# Altium PCB PCB2.PcbDoc (part 2 of 2)
Units mil, origin at the board's own origin, x right, y up, seen from the top; angles counter-clockwise.
Board outline 6000 x 4000 mil, 2 copper layers (Top Layer, Bottom Layer); 194 components, 0 nets, 778 pads, 711 vias.
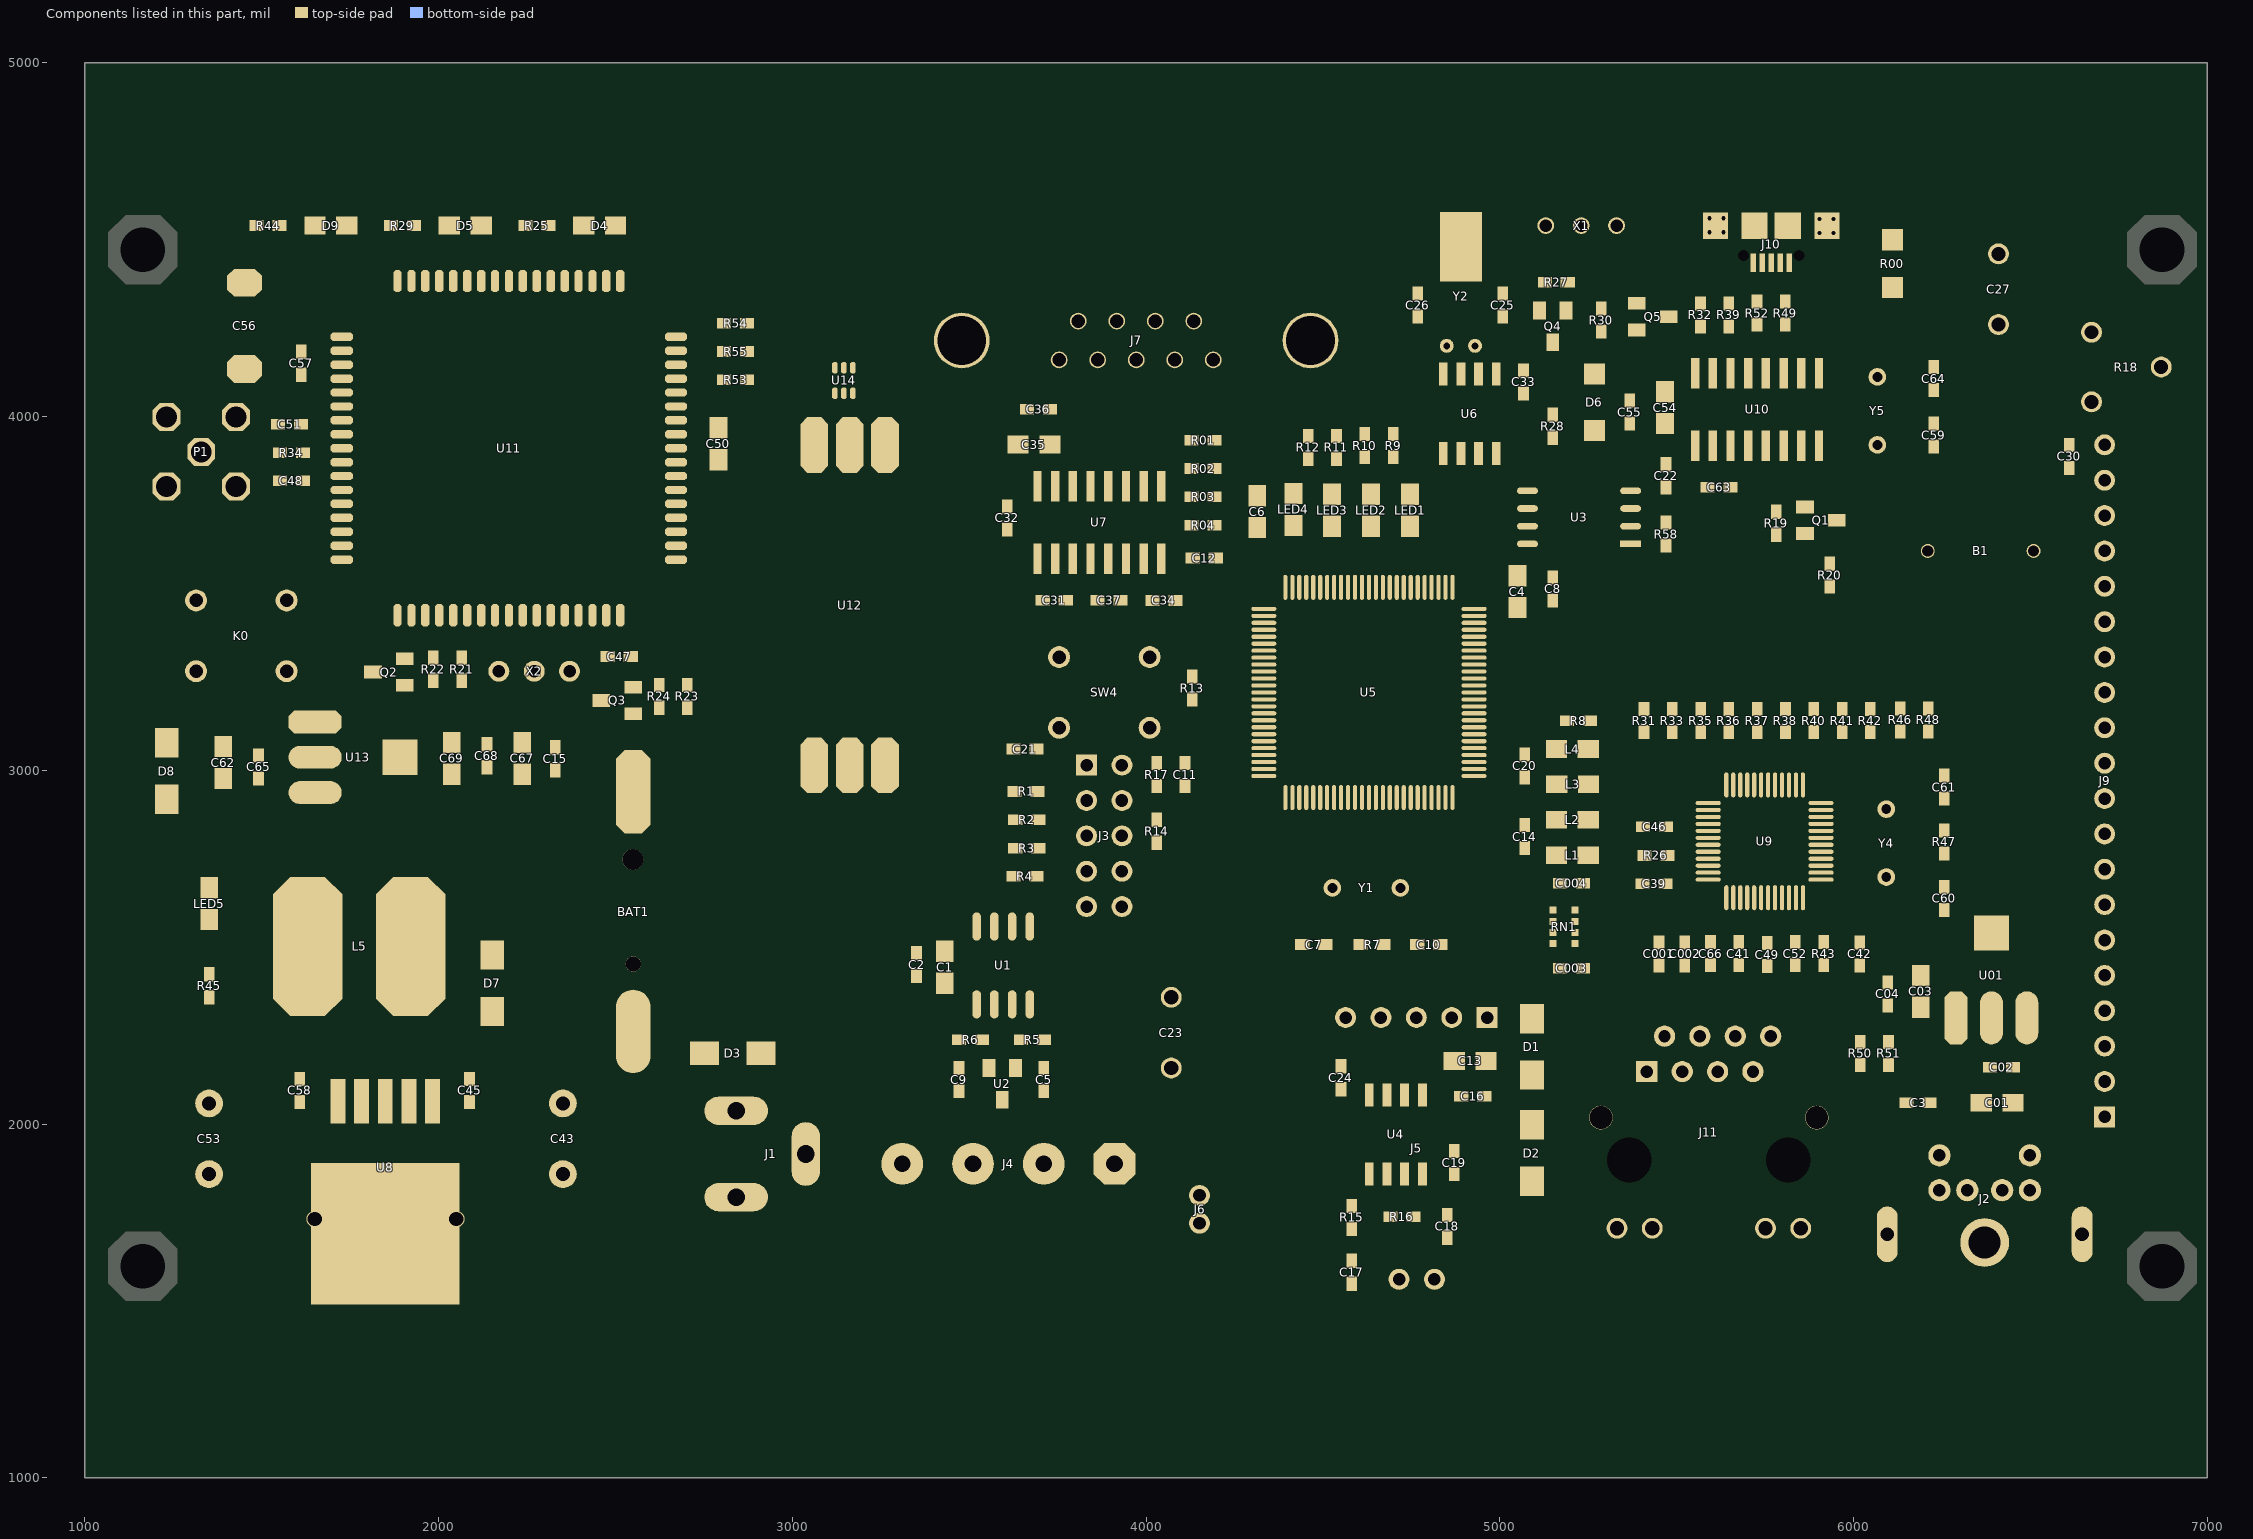
[diagram p2: the components of this part, seen from the top]

## Via types
v1: diameter 19.68, hole 11.81, Top Layer to Bottom Layer, tented both sides, 697 vias
v2: diameter 15.75, hole 11.81, Top Layer to Bottom Layer, tented both sides, 8 vias
v3: diameter 39.37, hole 27.56, Top Layer to Bottom Layer, tented both sides, 5 vias
v4: diameter 39.37, hole 19.68, Top Layer to Bottom Layer, tented both sides, 1 vias

## Nets (pads, with @x,y where several pads share a name; then routed paths per layer and width w, separated by ;. In a path a pad name is that pad's centre, name@x,y a point inside that pad or via, vN(x,y) a via of type N, cw(c..) or ccw(c..) an arc to the next point about the centre after c; other vN are vias at no path point) (continued)
copper on no net: | length 181062.3
  Top Layer w10: 2198.82,3438.2 v1(2198.82,3515.17) ; 2238.19,3438.2 2238.19,3510.08 2266.28,3538.17 2549.28,3538.17 2670.43,3417.02 4333.04,3417.02 ; v1(2281.28,3516.17) 2543.28,3516.17 2662.11,3397.33 4333.04,3397.33 ; 2370.28,3280.17 2370.28,3166.17 2430.28,3106.17 2752.28,3106.17 2868.28,3222.17 v1(3776.28,3222.17) ; 2703.39,3241.66 2713.9,3252.17 v1(3814.28,3252.17) ; 3145.67,4138.2 3145.67,4190.05 ; 3521.26,2558.2 3521.26,2640.44 3533.9,2653.08 3671.37,2653.08 3775.28,2549.17 4204.28,2549.17 4235.28,2580.17 4235.28,3052.17 4265.48,3082.37 4333.04,3082.37 ; 3671.26,2558.2 3704.3,2525.17 4222.28,2525.17 4255.28,2558.17 4255.28,3036.17 4281.8,3062.69 4333.04,3062.69 ; 3893.26,3803.34 3893.26,3725.63 3919.72,3699.17 4141.15,3699.17 ; 3932.01,2814.66 3951.5,2795.17 4030.28,2795.17 4188.28,2795.17 4213.28,2820.17 4213.28,3170.17 4243.6,3200.48 4333.04,3200.48 ; 3943.26,3803.34 3943.26,3738.62 3959.09,3722.79 4058.9,3722.79 4079.28,3743.17 4079.28,3837.17 4095.35,3853.24 4129.08,3853.24 ; 4010.28,3120.17 4010.28,3040.17 4030.28,3020.17 ; 4123.15,3699.17 4129.08,3693.24 4129.08,3684.41 ; v1(4130.28,3142.17) 4130.28,3200.17 ; v1(4190.28,2853.17) v1(4190.28,3286.17) ; 4194.08,3693.24 4241.35,3693.24 v1(4244.28,3696.17) ; 4194.08,3853.24 4196,3855.17 v1(4240.28,3855.17) ; 4195,3774.17 v1(4263.28,3774.17) ; 4197,3936.17 v1(4241.28,3936.17) ; v1(4257.06,3456.39) 4333.04,3456.39 ; v1(4278,3019.22) 4293.59,3003.63 4333.04,3003.63 ; v1(4279.74,3436.7) 4333.04,3436.7 ; v1(4287.91,3180.8) 4333.04,3180.8 ; v1(4319.28,3600.17) 4369.28,3600.17 4394.06,3575.39 4394.06,3517.41 ; 4333.04,2875.17 v4@4333.04,2909.17 ; 4333.04,2967.17 4333.04,2983.95 ; 4333.04,3102.06 v1(4395.17,3102.06) ; 4333.04,3121.74 4424.86,3121.74 4470.28,3167.17 4470.28,3335.17 v1(4446.28,3359.17) ; 4333.04,3141.43 4407.28,3141.43 4446.28,3180.43 v1(4446.28,3323.17) ; 4384.17,3633.4 4384.17,3613.84 4413.74,3584.26 4413.74,3517.41 ; 4394.06,2922.92 4394.06,3009.95 v1(4453.28,3069.17) ; v1(4394.28,3414.17) 4397.13,3417.02 4927.52,3417.02 ; 4413.74,2922.92 4413.74,2999.63 v1(4447.28,3033.17) ; 4416.9,3692.42 4416.9,3624.55 4427.28,3614.17 4609.28,3614.17 4630.28,3593.17 4630.28,3517.41 ; v1(4419.28,3391.17) 4425.45,3397.33 4927.52,3397.33 ; 4433.43,2922.92 4433.43,2987.32 v1(4482.28,3036.17) ; 4453.11,2922.92 4453.11,2975 v1(4477.28,2999.17) ; 4453.11,3517.41 4453.11,3466.33 4474.28,3445.17 v1(4513.28,3445.17) ; 4472.8,2922.92 4472.8,2962.69 v1(4512.28,3002.17) ; 4512.17,3517.41 v1@4512.17,3567.17 ; 4526.03,3690.17 4526.03,3648.17 4540.03,3634.17 4618.28,3634.17 4649.96,3602.48 4649.96,3517.41 ; 4531.85,3517.41 v1@4531.85,3593.17 ; 4571.22,2922.92 4571.22,3028.99 ; v1(4571.22,3465.17) 4571.22,3517.41 ; v1@4590.91,2866.8 4590.91,2922.92 ; v1(4590.91,3441.17) 4590.91,3517.41 ; 4606.89,2507.45 4506.89,2507.45 4526.89,2527.45 4526.89,2667.45 4610.59,2751.15 4610.59,2922.92 ; 4610.59,3517.41 4610.59,3462.85 4631.28,3442.17 v1(4864.28,3442.17) ; 4630.28,2922.92 4630.28,2756.19 4719.02,2667.45 4719.02,2555.33 4766.89,2507.45 4671.89,2507.45 ; 4636.27,3690.17 4636.27,3641.18 4669.65,3607.8 4669.65,3517.41 ; 4649.96,2922.92 v1(4649.96,2974.17) 4649.96,3266.85 v1(4751.28,3368.17) ; 4689.33,3517.41 4689.33,3633 4746.5,3690.17 ; 4709.02,3517.41 4709.02,3600.91 4737.28,3629.17 4773.28,3629.17 4840.28,3696.17 4840.28,3895.76 ; v1@4728.7,2871.17 4728.7,2922.92 ; 4728.7,3517.41 4728.7,3588.59 4751.28,3611.17 4783.28,3611.17 4890.28,3718.17 4890.28,3895.76 ; v1@4748.39,2845.17 4748.39,2922.92 ; 4748.39,3517.41 4748.39,3580.28 4762.28,3594.17 4794.28,3594.17 4940.28,3740.17 4940.28,3895.76 ; 4768.07,2913.33 4768.07,2821.37 4809.28,2780.17 5070.28,2780.17 ; 4768.55,4282.57 4768.55,4281.9 4850.28,4200.17 4890.28,4160.17 4890.28,4120.17 ; 4787.76,2922.92 4787.76,2834.69 4816.28,2806.17 5031.28,2806.17 5070.28,2845.17 ; 4807.44,2922.92 4807.44,2851 4829.28,2829.17 4970.28,2829.17 5070.28,2929.17 5070.28,2980.17 ; 4807.44,3517.41 4807.44,3578.33 5019.28,3790.17 5078.55,3790.17 ; 4827.13,2922.92 v1(4827.13,2974.17) ; 4827.13,3517.41 v1(4827.13,3567.02) ; v1(4839.28,2851.17) 4955.28,2851.17 5015.28,2911.17 5015.28,3035.17 5025.28,3045.17 5070.28,3045.17 ; 4846.82,2922.92 v1(4846.82,3007.41) ; 4846.82,3517.41 4846.82,3579.71 5007.28,3740.17 5078.55,3740.17 ; v1(4855.28,3035.17) 4867.13,3023.32 4927.52,3023.32 ; v1@4857.28,3062.69 4927.52,3062.69 ; v1@4857.28,3102.06 4927.52,3102.06 ; 4864.33,2301.03 4866.5,2303.2 ; 4866.5,2922.92 4866.5,2891.35 4880.36,2877.49 v1(4943.35,2877.49) ; 4866.5,3517.41 v1(4866.5,3565.95) ; v1(4879.28,3140.17) 4868.28,3151.17 4868.28,3185.17 4883.6,3200.48 4927.52,3200.48 ; v1(4879.45,3043) 4927.52,3043 ; v1@4879.48,3082.37 4927.52,3082.37 ; 4904.06,2983.95 4927.52,2983.95 4919.28,2975.7 v1(4919.28,2901.11) ; 4927.52,3003.63 4982.56,3003.63 4983.41,3004.47 ; 4927.52,3161.11 4989.23,3161.11 5024.28,3196.17 5279.28,3196.17 5321.28,3238.17 6366.28,3238.17 6426.28,3178.17 6426.28,2779.17 6586.28,2619.17 6586.28,2013.17 6546.28,1973.17 6484.28,1973.17 6446.28,1935.17 6446.28,1838.65 6420.48,1812.85 ; 4927.52,3180.8 4973.91,3180.8 5010.28,3217.17 5264.28,3217.17 5312.28,3265.17 6376.28,3265.17 6448.28,3193.17 6448.28,2792.17 6610.28,2630.17 6610.28,1991.17 6530.38,1911.27 6499.22,1911.27 ; 4927.52,3239.85 5253.97,3239.85 5304.28,3290.17 6393.28,3290.17 6494.28,3189.17 6494.28,2836.17 6710.28,2620.17 ; 4927.52,3259.54 5242.65,3259.54 5295.28,3312.17 6091.28,3312.17 ; 4927.52,3279.22 5228.34,3279.22 5281.28,3332.17 6200.28,3332.17 ; 4927.52,3298.91 5214.02,3298.91 5269.28,3354.17 6445.28,3354.17 6582.28,3217.17 6582.28,3048.17 6710.28,2920.17 ; 4927.52,3318.59 5198.28,3318.59 5255.85,3376.17 6461.28,3376.17 6610.28,3227.17 6610.28,3120.17 6710.28,3020.17 ; 4927.52,3338.28 5182.28,3338.28 5242.17,3398.17 6480.28,3398.17 6635.28,3243.17 6635.28,3195.17 6710.28,3120.17 ; 4927.52,3357.96 5164.28,3357.96 5223.48,3417.17 6507.28,3417.17 6704.28,3220.17 6710.28,3220.17 ; 4927.52,3377.65 5148.28,3377.65 5208.83,3438.2 6540.25,3438.2 6658.28,3320.17 6710.28,3320.17 ; 4927.52,3436.7 4990.75,3436.7 5002.41,3448.36 ; 4940.28,4120.17 4940.28,4190.17 4930.28,4200.17 4930.28,4204.3 5008.55,4282.57 ; v1(5130.07,3779.96) 5130.07,3919.96 5150.28,3940.17 ; v1(5140.28,3140.17) 5190.28,3140.17 ; v1(5161.28,3778.17) 5161.28,3881.17 5199.26,3919.15 5199.26,4157.02 v1(5230.75,4188.52) ; 5213.27,2509.93 v1(5264.77,2509.93) ; 5213.27,2541.43 v1(5247.92,2541.43) ; 5213.27,2572.92 5340.99,2572.92 ; 5213.27,2604.42 v1(5240.04,2604.42) ; 5235.28,2680.17 5250.28,2695.17 5250.28,2760.17 ; 5250.28,2959.38 5251.07,2960.17 ; v1(5260.28,3755.17) 5260.28,3667.17 5287.28,3640.17 5370.28,3640.17 5341.28,3640.17 ; v1(5290.28,3756.17) 5290.28,3709.17 5309.28,3690.17 5370.28,3690.17 5340.28,3690.17 ; 5331.42,1705.29 5331.42,1666.03 5379.28,1618.17 5913.28,1618.17 6019.26,1724.15 6019.26,2167.2 6019.26,2153.18 ; v2(5340.99,2248.2) 5340.99,2881.43 5367.03,2907.47 5589.55,2907.47 ; 5408,3108.2 5408,3027.2 5427,3008.2 5690,3008.2 5699.78,2998.41 5699.78,2958.65 ; 5416.07,2148.2 5360.67,2203.6 v1(5360.67,2601.9) 5360.67,2865.68 5382.78,2887.78 5589.55,2887.78 ; 5431.26,1705.29 5431.26,1719.74 5955.16,2243.63 5955.16,2668.83 5933.06,2690.93 5908.45,2690.93 ; 5450.28,2448.36 5450.28,2382.37 5514.22,2318.44 5514.22,2150.05 5516.07,2148.2 ; 5450.28,2513.36 v1(5450.28,2562.53) ; 5469,2679.2 5502,2679.2 5533.41,2710.62 5589.55,2710.62 5649.6,2710.62 5680.1,2680.11 5680.1,2639.75 5680.1,2578.99 5615.31,2514.2 5596,2514.2 ; 5470.91,2798.75 5494.53,2798.75 5543.3,2749.99 5589.55,2749.99 ; 5471.28,2848.41 5527.28,2848.41 ; 5474,2759.2 5506,2759.2 5534.89,2730.3 5589.55,2730.3 ; 5488,3083.2 5488,3108.2 5488,3052.2 5515,3025.2 5703,3025.2 5719.47,3008.73 5719.47,2958.65 ; v1(5522.88,2390.09) 5522.88,2448.36 ; 5522.88,2513.36 v1(5522.88,2561.74) ; 5568,3093.2 5568,3108.2 5568,3060.2 5583,3045.2 5712,3045.2 5739.15,3018.04 5739.15,2958.65 ; 5589.55,2809.04 v1(5641.72,2809.04) ; 5589.55,2828.73 v1(5659.89,2828.73) ; 5589.55,2848.41 5527.28,2848.41 ; 5589.55,2868.1 5662.3,2868.1 5671.7,2877.49 ; 5602.6,3917.81 v1(5602.6,3994.85) ; 5610.23,2958.65 5640.73,2958.65 5640.73,2904.52 5655.95,2889.3 ; 5612.64,2578.28 5652.01,2578.28 5660.41,2586.68 5660.41,2639.75 ; 5636.26,2769.67 5589.55,2769.67 5551.17,2769.67 5527.28,2793.56 5527.28,2848.41 ; 5647.6,4255.17 5702.6,4200.17 5702.6,4122.53 ; 5649.67,2710.69 5649.67,2768.08 ; 5652.6,3800.17 5673.11,3800.17 5702.6,3829.66 5702.6,3917.81 ; 5652.6,3917.81 v1(5652.6,3977.17) ; 5657.84,3098.36 5648,3108.2 5648,3081.2 5664,3065.2 5720,3065.2 5727,3058.2 5735,3050.2 5758.84,3026.36 5758.84,2958.65 ; 5676,2514.2 5676,2546.2 5719.47,2589.67 5719.47,2639.75 5719.47,2749.99 ; v1(5691.38,2716.07) 5699.78,2707.67 5699.78,2639.75 ; 5727.6,4260.17 5727.6,4242.85 v1(5762.25,4208.2) ; 5727.6,4325.17 5727.6,4350.72 5767.6,4390.72 5767.6,4434.85 ; 5728,3108.2 5728,3083.2 5778.52,3032.67 5778.52,2958.65 5778.52,3018.73 ; 5751.26,1705.29 5825.04,1779.07 5892.17,1779.07 5978.78,1865.68 5978.78,1932.81 5978.78,2696.39 5944.87,2730.3 5908.45,2730.3 ; 5752.6,3917.81 5752.6,3978.08 v1(5762.25,3987.73) ; 5756,2511.39 5756,2562.2 5778.52,2584.73 5778.52,2639.75 ; v1(5758.31,2708.2) 5758.84,2707.67 5758.84,2639.75 ; v1(5789.81,4208.2) 5807.6,4226 5807.6,4260.17 ; 5793.19,4434.85 5793.19,4339.58 5807.6,4325.17 ; v1(5793.74,3987.73) 5802.6,3978.87 5802.6,3917.81 ; 5798.21,2639.75 5798.21,2749.99 ; 5798.21,3008.41 5798.21,2958.65 5798.21,3098.41 5808,3108.2 ; 5817.89,2639.75 5817.89,2570.3 5836,2552.2 5836,2514.2 ; 5817.89,2958.65 5817.89,3039.1 5887,3108.2 5888,3108.2 ; 5821.3,2806.63 5858.26,2769.67 5908.45,2769.67 ; 5837.58,2639.75 5837.58,2592.62 5916,2514.2 ; 5837.58,2958.65 5837.58,3026.78 5870,3059.2 5948,3059.2 5968,3079.2 5968,3108.2 ; 5848.87,2749.99 5908.45,2749.99 5957.28,2749.99 ; v2(5851.89,2887.78) 5908.45,2887.78 ; 5852.6,3917.81 5852.6,3959.97 6004.93,4112.29 6067.6,4112.29 6095.48,4140.17 6227.6,4140.17 ; v2(5853.04,2848.41) 5908.45,2848.41 ; 5857.26,2987.47 5857.26,2958.65 5857.26,3010.47 5886,3039.2 v2(5926.28,3039.2) 6031,3039.2 6048,3056.2 6048,3108.2 ; v2(5862.28,2868.1) 5908.45,2868.1 ; v2(5863.72,2828.73) 5908.45,2828.73 5962.52,2828.73 5974,2840.2 5974,2980.2 5993,2999.2 6175,2999.2 6212,3036.2 6212,3109.73 6212,3117.2 ; 5902.6,3917.81 5902.6,3931.23 5978.78,4007.41 6041.78,4007.41 6067.6,3981.59 6067.6,3920.17 6072.6,3915.17 6227.6,3915.17 ; 5908.45,2789.36 6065.84,2789.36 6093,2762.2 ; 5908.45,2809.04 6067,2809.04 6093,2835.04 ; 5908.45,2907.47 v2(5908.45,2928.17) 5908.45,2997.65 5930,3019.2 6094,3019.2 6132,3057.2 6132,3109.73 6132,3117.2 ; v1@6008.47,2405.05 6018.15,2414.74 6018.15,2448.32 ; 6019.26,2232.2 6099.26,2232.2 ; v2(6062.28,2088.17) 6099.26,2125.15 6099.26,2167.2 ; 6093,2698.2 6093,2762.2 ; 6093,2890.33 6093,2835.04 ; 6197.3,3312.17 6091.28,3312.17 ; 6257,2670.2 6257,2765.2 6254,2762.2 6093,2762.2 ; 6257,2920.2 6257,2830.2 6252.15,2835.04 6093,2835.04 ; 6277.3,3332.17 6200.28,3332.17 ; 6710.28,2720.17 6525.28,2905.17 6525.28,3193.17 6406.28,3312.17 6091.28,3312.17 ; 6710.28,2820.17 6554.28,2976.17 6554.28,3204.17 6426.28,3332.17 6200.28,3332.17
  Top Layer w10.45: 6216.62,4086.15 6227.6,4075.17 6227.6,3980.17
  Top Layer w11.81: 2872.05,4104.03 2875.27,4100.81 3161.74,4100.81 3171.26,4110.33 3171.26,4138.2
  Top Layer w15.75: 2671.26,4068.12 2751.74,4068.12 2775.04,4044.81 3113.63,4044.81 3120.08,4051.27 3120.08,4066.2 3119.93,4066.2 ; 3060.08,3921.58 3062.21,3919.46 3062.21,4044.58 ; 3145.67,4066.2 v1(3145.67,4021.19) 3145.67,3935.99 ; 3147.09,3934.58 3145.67,3935.99 ; 3151.03,3930.64 3145.67,3935.99 ; 3162.21,3919.46 3162.21,3984.42 ; 3171.26,4066.2 3171.26,4042.29 3192.64,4020.92 3262.21,3951.35 3262.21,3919.46 ; 3181.66,4138.2 3171.26,4138.2 3291.89,4138.2 3338.04,4092.06 v1(3338.04,3927.17) ; 3262.21,3013.95 3311.11,3013.95 3338.02,3040.86 v1(3338.04,3093.17)
  Top Layer w19.68: 1314.38,3280.17 1570.28,3280.17 1811.78,3280.17 ; 1329.06,3900.4 1331.26,3898.2 ; 1351.26,2358.2 1351.26,2058.2 1355.71,2062.65 1607.48,2062.65 1607.48,1976.15 1629.37,1954.26 1763.23,1954.26 1782.29,1973.32 1782.29,2064.03 ; 1390.95,3066.94 1465.95,3066.94 1490.95,3041.94 ; 1485.28,4540.17 1485.28,4492.17 1514.28,4463.17 1640.28,4463.17 1726.38,4377.07 1726.38,4225.6 ; 1550.28,4540.17 1650.28,4540.17 ; 1607.48,2127.65 1680.4,2127.65 1715.36,2092.69 1715.36,2064.03 ; 1726.38,3674.42 1773.53,3674.42 1798.28,3699.17 1798.28,4473.17 1865.28,4540.17 ; 1814,3278.2 1814.28,3278.48 ; 1814,3368.34 1883.86,3438.2 ; 1814.28,3277.67 1814.28,3278.48 ; 1814.28,3368.07 1814.28,3278.48 ; 1817.86,3282.06 1814.28,3278.48 ; 1904.28,3240.17 2052.23,3240.17 2065.26,3253.2 ; 1930.28,4540.17 2030.28,4540.17 ; 2001.97,3438.2 2001.97,3545.48 1837.65,3709.8 1837.65,4451.54 1854.28,4468.17 2219.28,4468.17 2245.28,4494.17 2245.28,4540.17 ; 2065.26,3318.2 2077.31,3330.25 2128.39,3330.25 2158.31,3360.17 2238.28,3360.17 2270.28,3328.17 2270.28,3280.17 ; 2087.48,2127.65 2087.48,2254.42 2151.26,2318.2 ; 2310.28,4540.17 2410.28,4540.17 ; 2463.67,3194.9 2474.41,3205.65 2474.41,3438.2 ; 2543.39,3321.66 2544.65,3320.4 2544.65,3239.07 2547.25,3241.66 2623.39,3241.66 ; 2550.28,2938.82 2674.93,2814.17 3375.28,2814.17 3461.28,2900.17 v1@3461.28,3019.17 ; 2550.28,3160.17 2686.9,3160.17 2703.39,3176.66 ; 2671.26,3910.64 2724.18,3910.64 2756.62,3878.2 2791.26,3878.2 ; 2671.26,4028.75 2730.71,4028.75 2791.26,3968.2 ; 2671.26,4107.49 2803.59,4107.49 2807.05,4104.03 ; 2671.26,4146.86 2769.89,4146.86 2807.05,4184.03 ; 2671.26,4186.23 2729.26,4186.23 2807.05,4264.03 ; 2872.05,4184.03 v1(3007.33,4184.03) ; 2872.05,4264.03 v1(2931.26,4264.03) ; 3608.26,3680.98 3728.26,3680.98 3743.26,3665.98 3743.26,3598.62 ; 3628.28,2940.17 3630.28,2938.17 ; 3630.28,2780.17 3630.28,2860.17 3630.28,2938.17 ; 3690.28,2700.17 3775.79,2614.66 3832.01,2614.66 ; 3690.28,3060.17 3735.32,3060.17 3754.37,3079.22 3754.37,3120.17 ; 3693.26,3598.62 3693.26,3495.98 3708.26,3480.98 ; 3693.28,2940.17 3806.5,2940.17 3832.01,2914.66 ; 3695.28,2780.17 3766.5,2780.17 3832.01,2714.66 ; 3728.26,4020.98 3728.26,3920.98 3743.26,3905.98 3743.26,3803.34 ; 3773.26,3480.98 3793.26,3500.98 3793.26,3598.62 ; 3793.26,3803.34 3793.26,3946.2 3972.28,4125.22 3972.28,4160.17 ; 3832.01,3014.66 3812.96,2995.6 3644.14,2995.6 3630.28,2981.74 3630.28,2938.17 ; 3843.26,3598.62 3843.26,3500.98 3863.26,3480.98 ; 3843.26,3803.34 3843.26,3887.2 4081.28,4125.22 4081.28,4160.17 ; 3893.26,3598.62 3893.26,3544.98 3928.26,3509.98 3928.26,3480.98 ; 3943.26,3598.62 3943.26,3551.98 4008.26,3486.98 4008.26,3480.98 ; 4129.08,3693.24 4129.08,3773.24 ; 4129.08,3853.24 4129.08,3933.24 ; 4197.28,3600.17 v1(4319.28,3600.17) 4319.28,3681.17 4314.28,3686.17 ; 4416.9,3782.42 4458.54,3824.06 4458.54,3880.54 ; 4526.03,3780.17 4538.54,3792.68 4538.54,3880.54 ; 4564.33,2301.03 4637.17,2228.2 4731.26,2228.2 4781.26,2178.2 4781.26,2082.61 ; 4618.54,3885.54 4618.54,3797.89 4636.27,3780.17 ; 4698.54,3885.54 4698.54,3828.13 4746.5,3780.17 ; 4698.54,3950.54 4698.54,4037.43 4714.28,4053.17 4965.28,4053.17 4990.28,4078.17 ; 4956.26,2078.2 4956.26,2173.2 4961.26,2178.2 ; 4990.28,3895.76 v1(4990.28,4028.17) ; 4990.28,4120.17 4990.28,4078.17 ; 5008.55,4347.57 5044.88,4347.57 5067.45,4325 5067.45,4130.4 ; 5050.28,3460.17 5130.28,3460.17 5150.28,3480.17 ; 5067.45,4065.4 5003.04,4065.4 4990.28,4078.17 ; 5070.28,2780.17 5090.28,2760.17 5160.28,2760.17 ; 5070.28,2845.17 5085.28,2860.17 5160.28,2860.17 ; 5070.28,2980.17 5090.28,2960.17 5161.07,2960.17 ; 5070.28,3045.17 5085.28,3060.17 5160.28,3060.17 ; 5112.6,4300.17 5112.6,4365.17 5127.6,4380.17 ; 5147.6,4005.17 5147.6,4207.67 5150.1,4210.17 ; 5150.28,2541.43 5150.28,2509.93 5150.28,2460.17 5170.28,2440.17 ; 5150.28,2572.92 5150.28,2604.42 v1(5150.28,2637.33) 5150.28,2660.17 5170.28,2680.17 ; 5187.6,4300.17 5282.6,4300.17 5287.6,4305.17 ; 5192.6,4380.17 v1(5324.28,4380.17) ; 5267.6,3960.17 v1(5267.6,4040.33) ; 5267.6,4120.96 5335.16,4188.51 5455.16,4188.51 5477.6,4210.96 5477.6,4282.67 5477.6,4305.44 5492.33,4320.17 5567.6,4320.17 ; 5287.6,4240.17 v1(5337.05,4240.17) 5382.6,4240.17 5387.6,4245.17 ; 5367.6,3980.17 5467.6,3980.17 5467.6,3867.84 ; 5367.6,4045.17 5392.6,4070.17 5467.6,4070.17 5467.6,4106.49 5483.64,4122.53 v1(5516.28,4122.53) 5552.6,4122.53 5552.6,4240.17 5567.6,4255.17 ; 5370.28,3640.17 5465.28,3640.17 5470.28,3635.17 ; 5370.28,3740.17 5470.28,3740.17 ; 5370.28,3790.17 5370.28,3849.17 5386.28,3865.17 5470.28,3865.17 5550.6,3865.17 ; 5387.6,4320.17 5440.99,4373.55 5636.26,4373.55 5647.6,4362.22 5647.6,4320.17 ; 5470.28,3700.17 5470.28,3740.17 ; 5470.28,3800.17 5470.28,3740.17 ; 5543.28,3545.17 5543.28,3716.17 5519.28,3740.17 5470.28,3740.17 ; 5552.6,3917.81 5552.6,3835.17 5587.6,3800.17 ; 5566.07,2248.2 5566.07,2293.96 5597.28,2325.17 v1(5904.28,2325.17) ; 5636.26,2769.67 5666.78,2769.67 5686.46,2749.99 5719.47,2749.99 5798.21,2749.99 5848.87,2749.99 ; v1(5652.6,4054.07) 5652.6,4122.53 ; v1(5733.28,3666.17) 5782.28,3666.17 ; 5782.28,3731.17 5795.35,3744.24 5863.38,3744.24 ; 5933.28,3519.17 6174.28,3519.17 6210.28,3555.17 6210.28,3603.17 ; 5933.28,3584.17 5953.38,3604.27 5953.38,3706.74 ; 5957.28,2749.99 5967.28,2749.99 ; 6150.28,2060.17 6150.28,1985.17 ; 6243.31,1532.2 6243.31,1812.85 6185.16,1812.85 6150.28,1847.73 6150.28,1985.17 ; 6451.28,2060.17 6451.28,2018.17 6417.28,1984.17 6151.28,1984.17 6150.28,1985.17
  Top Layer w23.62: 1616.26,3898.2 1628.7,3910.64 1726.38,3910.64
  Top Layer w27.56: 1331.26,3898.2 1551.26,3898.2 1551.26,3818.2 ; 1611.26,3978.2 1616.26,3973.2 1616.26,3898.2 ; 3351.26,2418.2 3371.26,2398.2 3431.26,2398.2 ; 3351.26,2483.2 3426.26,2483.2 3431.26,2488.2 3446.3,2473.17 3956.3,2473.17 4071.26,2358.2 ; 3471.26,2238.2 3471.26,2158.2 3527.02,2158.2 ; 3510.87,1887.33 3527.02,1903.48 3527.02,2158.2 ; 3536.26,2238.2 3571.26,2273.2 3571.26,2338.2 ; 3556.26,2158.2 3527.02,2158.2 ; 3571.26,2473.17 3571.26,2558.2 ; 3621.26,2338.2 3621.26,2263.2 3646.26,2238.2 ; 3631.26,2158.2 3664.81,2158.2 ; 3710.87,1887.33 3660.87,1937.33 3660.87,2154.26 3664.81,2158.2 ; 3711.26,2238.2 3711.26,2158.2 3664.81,2158.2 ; 3932.01,3014.66 3991.5,2955.17 4030.28,2955.17 ; 4030.28,2860.17 v1(4030.28,2907.17) 4030.28,2955.17 ; 4110.28,2955.17 4030.28,2955.17 ; 4151.26,1719.46 4192.45,1760.64 4436.82,1760.64 4517.27,1841.09 4518.37,1841.09 4731.26,2053.98 4731.26,2082.61 ; 4151.26,1798.2 4421.26,1798.2 4631.26,2008.2 4631.26,2082.61 ; 4581.26,1548.2 4702.84,1548.2 4715.52,1560.88 ; 4581.26,1613.2 4581.26,1703.2 ; 4581.26,1768.2 4611.26,1768.2 4631.26,1788.2 4631.26,1858.2 ; 4681.26,1858.2 4681.26,1748.2 4691.26,1738.2 ; 4681.26,2082.61 4681.26,2118.2 ; 4731.26,1858.2 4731.26,1918.2 4751.26,1938.2 4856.26,1938.2 4871.26,1923.2 ; 4756.26,1738.2 4846.26,1738.2 4851.26,1743.2 ; 4781.26,1858.2 4861.26,1858.2 ; 4815.52,1560.88 4851.26,1596.62 4851.26,1678.2 ; 4871.26,2178.2 4871.26,2098.2 4891.26,2078.2 4891.26,1943.2 4886.26,1938.2 ; 4929.28,3467.17 4929.28,3503.17 4976.28,3550.17 5050.28,3550.17 ; 5078.55,3640.17 5078.55,3550.17 5145.28,3550.17 5150.28,3545.17 5543.28,3545.17 5826.28,3545.17 5863.38,3582.27 5863.38,3669.24 ; 5250.28,3060.17 5250.28,3135.17 5255.28,3140.17 ; 5404,2679.2 5404,2838.89 5405.28,2840.17 ; 5408,3173.2 5488,3173.2 v1(5528.28,3173.2) 5556.25,3173.2 ; 5596,2448.32 5756,2448.32 5916,2448.32 ; 5648,3173.2 5728,3173.2 5808,3173.2 5888,3173.2 5968,3173.2 ; 5967.28,2749.99 5991.46,2749.99 6018.15,2723.3 6018.15,2513.32 ; 6049.53,3174.73 v1(6090.28,3174.73) 6132,3174.73 6212,3174.73 6304.28,3174.73 6341.28,3137.73 6341.28,2589.14 6390.31,2540.11 ; 6096.89,2335.17 6131.96,2300.11 6290.31,2300.11 ; 6215.28,2060.17 6361.28,2060.17 6361.28,2135.17 6386.28,2160.17 ; 6217.25,2058.2 6218.94,2059.89
  Top Layer w39.37: 1351.26,2423.2 1351.26,2578.2 ; 1650.88,3036.91 1890.89,3036.91 1939.2,2988.59 2036.78,2988.59 2236.78,2988.59 ; 1715.36,2064.03 1715.36,2142.61 1747.48,2174.73 1810.48,2174.73 1849.22,2135.99 1849.22,2064.03 1849.22,1690.17 ; 1916.15,2064.03 1916.15,2175.36 ; 2151.26,2318.2 2207.81,2261.65 2550.28,2261.65 ; 3657.26,4014.98 3638.26,3995.98 3638.26,3920.98 v3(3638.26,3843.98) 3680.26,3801.98 ; 3754.37,3120.17 4010.28,3120.17 ; 3832.01,3014.66 3932.01,3014.66 ; 4071.26,2358.2 4266.26,2163.2 4551.26,2163.2 4656.26,2163.2 4681.26,2138.2 4681.26,2118.2 ; v3(4320.28,2567.17) v4(4320.28,2909.17) 4320.28,2967.17 ; v1(4365.28,3982.17) 4421.91,3982.17 4458.54,3945.54 4538.54,3945.54 4739.91,3945.54 v1(4773.28,3912.17) ; 4961.26,2178.2 4961.26,2297.96 4964.33,2301.03 ; 5091.26,1838.2 v3(5091.26,1738.2) 5091.26,1605.18 5166.28,1530.17 6480.28,1530.17 6523.28,1573.17 6523.28,1725.17 6665.28,1867.17 6833.28,1867.17 6924.28,1958.17 6924.28,3946.17 6728.28,4142.17 6528.28,4142.17 6410.28,4260.17 ; 5150.28,3545.17 5197.28,3592.17 v1@5197.28,3869.17 ; 5250.28,2860.17 5250.28,2959.38 ; 5566.07,2248.2 5616.07,2198.2 5616.07,2148.2 ; 5831.28,4413.17 v1(5879.28,4365.17) 6110.28,4365.17 ; 6019.26,2232.2 6019.26,2326.17 6019.26,2349.15 6083.59,2413.48 ; 6027.28,2513.32 6060.74,2513.32 6090.28,2483.78 6090.28,2420.17 6190.28,2420.17 6277.28,2507.17 6357.37,2507.17 6390.31,2540.11 6390.31,2300.11 ; 6110.28,4500.17 6190.28,4500.17 6410.28,4280.17 6410.28,4260.17 ; 6451.28,2060.17 6451.28,2160.17 v3(6490.28,2199.17) 6490.28,2300.07 ; 6710.28,2120.17 6772.28,2120.17 6821.28,2169.17 6821.28,3772.17 6773.28,3820.17 6710.28,3820.17 6545.28,3820.17 6410.28,3955.17 6410.28,4260.17
  Top Layer w59.06: 1231.26,3077.65 1097.88,3211.03 1097.88,4072.37 1159.77,4134.26 1451.26,4134.26 ; 1650.88,2936.91 1650.88,2857.56 1689.28,2819.17 2208.28,2819.17 2434.28,2593.17 3289.28,2593.17 3381.28,2501.17 ; 1995.52,2058.2 2326.22,2058.2 ; 2351.26,2058.2 2647.68,2058.2 2751.81,2162.33 2751.81,2200.17 ; 2841.26,2037.29 2911.26,2107.29 2911.26,2200.17 ; 4964.33,2301.03 5087.88,2301.03 ; 5091.26,1997.65 5091.26,2138.2
  Top Layer w78.74: 1351.26,2058.2 1293.15,2058.2 1208.11,2143.24 1208.11,2851.9 1293.12,2936.91 1615.18,2936.91 ; 1355.71,2062.65 1629.69,2336.62 1629.69,2501.98 ; 1451.26,4134.26 1517.41,4068.12 1718.32,4068.12 ; 1916.15,2175.36 1916.15,2497.1 1921.03,2501.98 1945.36,2477.65 2141.19,2477.65
  Bottom Layer w10: v1@2199.82,3516.17 v1(2281.28,3516.17) ; v1(3776.28,3222.17) 4506.91,3222.17 4590.91,3306.17 v1(4590.91,3441.17) ; v1(3814.28,3252.17) 4499.28,3252.17 4571.22,3324.11 v1(4571.22,3465.17) ; 3832.01,2614.66 3690.79,2614.66 3665.28,2640.17 3665.28,3320.17 3665.28,3402.17 3719.5,3456.39 v1(4257.06,3456.39) ; 3832.01,2714.66 3881.53,2764.17 4172.28,2764.17 4190.28,2782.17 v1(4190.28,2853.17) ; 3832.01,2814.66 3724.28,2814.66 3685.28,2853.66 3685.28,3290.17 3685.28,3392.7 3729.28,3436.7 v1(4279.74,3436.7) ; 3832.01,2914.66 3881.28,2963.92 3881.28,3140.17 3921.91,3180.8 v1(4287.91,3180.8) ; 4010.28,2974.17 v1(4649.96,2974.17) ; 4130.28,3130.17 4130.28,3120.17 4148.39,3102.06 v1(4395.17,3102.06) 4452.17,3102.06 v1(5130.07,3779.96) ; v1(4190.28,3286.17) 4472.28,3286.17 4513.28,3327.17 v1(4513.28,3445.17) ; v1(4240.28,3855.17) 4240.28,3752.17 4254.28,3738.17 4389.28,3738.17 4419.28,3708.17 v1(4419.28,3391.17) ; v1(4241.28,3936.17) 4436.28,3936.17 4471.28,3901.17 4471.28,3348.17 v1(4446.28,3323.17) ; v1(4244.28,3696.17) 4372.28,3696.17 4394.28,3674.17 v1(4394.28,3414.17) ; v1(4263.28,3774.17) 4429.28,3774.17 4446.28,3757.17 v1(4446.28,3359.17) ; v1(4447.28,3033.17) 4715.28,3301.17 6545.28,3301.17 6664.28,3420.17 6710.28,3420.17 ; v1(4453.28,3069.17) 4710.28,3326.17 6523.28,3326.17 6710.28,3513.17 6710.28,3520.17 ; v1(4477.28,2999.17) 4736.28,3258.17 6531.28,3258.17 6582.28,3207.17 6582.28,2480.17 6642.28,2420.17 6710.28,2420.17 ; v1(4482.28,3036.17) 4725.28,3279.17 6544.28,3279.17 6606.28,3217.17 6606.28,2561.17 6647.28,2520.17 6710.28,2520.17 ; v1(4512.28,3002.17) 4750.28,3240.17 6516.28,3240.17 6562.28,3194.17 6562.28,2401.17 6643.28,2320.17 6710.28,2320.17 ; v1(4512.28,3567.17) 4512.28,3926.17 4580.96,3994.85 v1(5602.6,3994.85) ; v1(4532.28,3593.17) 4532.28,3913.17 4596.28,3977.17 5592.62,3977.17 5593.72,3976.07 5651.5,3976.07 v1(5652.6,3977.17) ; 4564.33,2301.03 4602.28,2338.98 4602.28,2649.17 4729.28,2776.17 v1(4729.28,2871.17) ; v1(4751.28,3368.17) v1(5161.28,3778.17) ; 4764.33,2301.03 4919.28,2455.98 v1(4919.28,2901.11) ; v1(4827.13,2974.17) 4837.13,2984.17 5735.28,2984.17 5769.28,2950.17 5769.28,2836.17 5812.28,2793.17 5902.28,2793.17 5926.28,2817.17 v2(5926.28,3039.2) ; v1(4827.13,3567.02) 4848.28,3588.17 4848.28,3824.17 4877.28,3853.17 5257.28,3853.17 5290.28,3820.17 v1(5290.28,3756.17) ; v1(4839.28,2851.17) 4833.28,2845.17 v1@4748.39,2845.17 ; v1(4846.82,3007.41) 5753.04,3007.41 5774.28,2986.17 5785.28,2975.17 5785.28,2844.17 5818.28,2811.17 5892.28,2811.17 5908.45,2827.34 v2(5908.45,2928.17) ; v1@4857.28,3062.69 5780.76,3062.69 5818.28,3025.17 5818.28,2866.17 5836.04,2848.41 v2(5853.04,2848.41) ; v1(4857.28,3102.17) 5799.28,3102.17 5851.89,3049.56 v2(5851.89,2887.78) ; v1(4864.28,3442.17) 5088.28,3666.17 v1(5733.28,3666.17) ; 4864.33,2301.03 4864.33,2355.22 4942.8,2433.69 v1@4942.8,2877.49 ; 4866.5,2303.2 4876.28,2312.98 ; v1(4866.5,3565.95) 4866.5,3811.39 4888.28,3833.17 5239.28,3833.17 5260.28,3812.17 v1(5260.28,3755.17) ; v1(4879.28,3082.17) 5789.28,3082.17 5834.28,3037.17 5834.28,2881.62 5844.93,2870.97 5859.41,2870.97 v2(5862.28,2868.1) ; v1(4879.28,3140.17) v1(5140.28,3140.17) ; v1(4879.45,3043) 5774.28,3043 5801.28,3016 5801.28,2855.73 5828.28,2828.73 v2(5863.72,2828.73) ; v1(5240.04,2604.42) 5358.15,2604.42 v1(5360.67,2601.9) ; v1(5247.92,2541.43) 5429.18,2541.43 v1(5450.28,2562.53) 5450.28,2617.6 v1(5641.72,2809.04) ; v1(5264.77,2509.93) 5497.05,2509.93 5522.88,2535.76 v1(5522.88,2561.74) 5522.88,2661.74 5659.89,2798.75 v1(5659.89,2828.73) v1@5660.5,2828.11 ; v2(5340.99,2248.2) 5466.07,2248.2 ; v1(5522.88,2390.09) 5664.77,2248.2 5666.07,2248.2 ; v1(5528.28,3173.2) 5528.28,3150.83 5547.26,3131.85 6067.79,3131.85 6090.28,3154.34 v1(6090.28,3174.73) v1@6090.28,3176.82 ; v1(5762.25,3987.73) v1(5762.25,4208.2) ; v1(5793.74,3987.73) v1@5793.74,4204.26 ; 5851.11,1705.29 5976.4,1705.29 6018.28,1747.17 6018.28,2044.17 v2(6062.28,2088.17) ; v1@4748.39,2845.17 4748.39,2845.28 v1(4748.28,2845.17) v1@4748.39,2845.17
  Bottom Layer w15.75: v1(2931.26,4264.03) 2931.26,4043.12 2953.19,4021.19 v1(3145.67,4021.19) ; v1@3001.86,4184.03 v1(3007.33,4184.03) 3144.69,4184.03 3192.92,4135.8 v1(3192.92,4021.19) ; v1(3338.04,3093.17) v1(3338.04,3927.17)
  Bottom Layer w19.68: v1@3461.28,3020.17 3461.28,3987.17 3502.28,4028.17 v1(4990.28,4028.17) ; 3932.01,2914.66 3985.77,2914.66 4010.28,2939.17 4010.28,2974.17 4010.28,3120.17 ; v1(4030.28,2907.17) v4@4318.28,2907.17 ; 4175.28,3981.17 4175.28,3621.17 4196.28,3600.17 v1(4319.28,3600.17) ; v4(4320.28,2909.17) 4345.28,2934.17 4575.28,2934.17 ; 4558.28,2934.17 4575.28,2934.17 ; v1(4584.78,2860.67) 4584.78,2924.67 4575.28,2934.17 ; v1(4855.28,3035.17) 4777.28,3035.17 4676.28,2934.17 ; 5150.28,2619.38 5150.28,2414.66 5195.32,2369.62 5444.65,2369.62 5566.07,2248.2 ; 5230.28,4540.17 5230.75,4539.7 5230.75,4479.7 v1(5230.75,4188.52) ; v1(5251.28,2910.17) 5227.28,2934.17 4676.28,2934.17 ; v1(5267.6,4040.33) 5267.6,4477.49 5330.28,4540.17 ; v1(5324.28,4380.17) 5864.28,4380.17 v1(5879.28,4365.17) ; v1(5337.05,4240.17) 5337.05,4094.4 5377.38,4054.07 v1(5652.6,4054.07) ; v1(5516.28,4122.53) 5516.28,4362.17 5533.28,4379.17 ; v1(5904.28,2325.17) v1(6018.26,2325.17) ; 6673.43,4041.74 6766.7,4041.74 6793.28,4015.17 6793.28,3748.17 6765.28,3720.17 6710.28,3720.17 ; 6710.28,2220.17 6780.28,2220.17 6826.28,2266.17 6826.28,4096.17 6870.28,4140.17 ; 4575.28,2934.17 4676.28,2934.17
  Bottom Layer w39.37: v3(2137.28,2942.17) 2137.28,2893.17 2498.28,2532.17 4285.28,2532.17 v3(4320.28,2567.17) ; 3568.28,2535.17 3568.28,3774 v3(3638.26,3843.98) 3776.45,3982.17 v1(4365.28,3982.17) ; 4071.26,2358.2 4691.26,1738.2 v3(5091.26,1738.2) ; v1(4773.28,3912.17) 5174.28,3912.17 5195.28,3891.17 v1@5195.28,3885.17 ; 6673.43,4238.59 6629.71,4238.59 6566.28,4175.17 6566.28,3888.17 6634.28,3820.17 6710.28,3820.17
  Bottom Layer w59.06: 2351.26,2058.2 2449.25,2058.2 2520.28,1987.17 2520.28,1671.17 2589.28,1602.17 3821.28,1602.17 3910.87,1691.76 3910.87,1887.33
  other v1: 4368.55,1546.78 4423.67,1558.59 1577.21,1568.44 2394.14,1578.28 5329.18,1582.22 5470.91,1582.22 5589.02,1582.22 5671.7,1582.22 5774.06,1582.22 5876.42,1582.22 2138.23,1588.12 4478.78,1590.09 1350.83,1597.96 2216.97,1607.81 1478.78,1617.65 6006.34,1617.65 4045.71,1633.4 6183.51,1637.33 4466.97,1645.21 2354.77,1647.18 5230.75,1653.08 4388.23,1657.02 2945.32,1686.55 4301.62,1688.52 2640.2,1696.39 2709.1,1696.39 2837.05,1696.39 4474.85,1700.33 1468.94,1706.23 4045.71,1723.95 3614.61,1725.92 6183.51,1725.92 3496.5,1735.76 3781.93,1735.76 3348.86,1745.6 3122.49,1765.29 2640.2,1775.13 1528,1784.97 2157.92,1784.97 5230.75,1786.94 4734.69,1790.88 1163.82,1794.81 4045.71,1798.75 1252.41,1804.66 3388.23,1804.66 5002.41,1826.31 6085.08,1834.18 2098.86,1863.71 4301.62,1865.68 1537.84,1873.55 2246.5,1873.55 2620.52,1873.55 6577.21,1873.55 5524.06,1883.4 2827.21,1893.24 6350.83,1893.24 4049.65,1901.11 5002.41,1901.11 4402.01,1903.08 1124.45,1912.92 2925.63,1922.77 4106.74,1922.77 6085.08,1922.77 5230.75,1928.67 1252.41,1932.61 2433.51,1932.61 2620.52,1932.61 3142.17,1932.61 6380.36,1932.61 6626.42,1932.61 6754.38,1932.61 1498.47,1942.45 2738.63,1942.45 6321.3,1942.45 6685.48,1942.45 6823.27,1942.45 4707.13,1948.36 2118.55,1952.3 4293.75,1962.14 4766.19,1968.04 4998.47,1968.04 4935.48,1971.98 5445.32,1981.82 5602.8,1981.82 4837.05,1983.79 1478.78,1991.67 1203.19,2001.51 6085.08,2001.51 3870.52,2011.35 6783.9,2011.35 6852.8,2011.35 4215.01,2031.04 4553.59,2031.04 5405.95,2040.88 5533.9,2040.88 5632.33,2040.88 3191.38,2050.72 6813.43,2050.72 1114.61,2060.56 6655.95,2060.56 3833.12,2070.41 3943.35,2070.41 5018.15,2070.41 6862.64,2090.09 3339.02,2099.93 4435.48,2101.9 5230.75,2105.84 3063.43,2109.78 6281.93,2109.78 6537.84,2109.78 4833.12,2117.65 3850.83,2149.15 2236.66,2158.99 2000.44,2168.83 2463.04,2168.83 6655.95,2168.83 3939.41,2172.77 1783.9,2174.73 2364.61,2178.67 1705.16,2188.52 1842.96,2188.52 2059.49,2188.52 3152.01,2188.52 3250.44,2188.52 6207.13,2196.39 1104.77,2198.36 1291.78,2198.36 1616.58,2198.36 3043.75,2198.36 6547.68,2198.36 2157.92,2218.04 3998.47,2223.95 1665.79,2227.89 1803.59,2227.89 5868.55,2227.89 4500.44,2237.73 4407.92,2239.7 6222.88,2243.63 4342.96,2247.57 6655.95,2267.26 1419.73,2277.1 1291.78,2286.94 2640.2,2286.94 4431.54,2286.94 2876.42,2296.78 3191.38,2306.63 3388.23,2306.63 2069.34,2316.47 3004.38,2326.31 3968.94,2326.31 4283.9,2326.31 6872.49,2334.18 1468.94,2336.15 3073.27,2336.15 2787.84,2346 3270.12,2346 3752.41,2346 4372.49,2346 4482.72,2349.93 4211.07,2357.81 5747.28,2373.17 5613.28,2374.17 5686.28,2374.17 5824.28,2374.17 1114.61,2375.52 2069.34,2375.52 2659.89,2385.37 3840.99,2385.37 2433.51,2395.21 4716.97,2395.21 2266.19,2405.05 6006.34,2405.05 1429.57,2414.89 4155.95,2414.89 4539.81,2414.89 3279.97,2424.74 2403.98,2434.58 4274.06,2434.58 4382.33,2434.58 4100.83,2436.55 2630.36,2444.42 2738.63,2444.42 4716.97,2454.26 6764.22,2464.11 2315.4,2483.79 1468.94,2493.63 2394.14,2493.63 1291.78,2503.48 6148.08,2515.29 1104.77,2523.16 6872.49,2523.16 1429.57,2542.85 2315.4,2542.85 6144.14,2552.69 2216.97,2562.53 2089.02,2572.37 6655.95,2572.37 4431.54,2582.22 4854.77,2582.22 5907.92,2582.22 6498.47,2582.22 4667.76,2601.9 5560.28,2611.17 1488.63,2611.74 4165.79,2611.74 6094.93,2611.74 3632.33,2613.71 4087.05,2621.59 6153.98,2621.59 2285.87,2631.43 4785.87,2631.43 5589.28,2636.17 3417.76,2641.27 5907.92,2641.27 6478.78,2641.27 1104.77,2651.11 2207.13,2651.11 3466.97,2651.11 1429.57,2660.96 4126.42,2660.96 3782.01,2664.89 2108.71,2670.8 6409.89,2670.8 6764.22,2670.8 2492.56,2680.64 2659.89,2690.48 4087.05,2700.33 4165.79,2700.33 4441.38,2700.33 6183.51,2700.33 1498.47,2710.17 2177.6,2710.17 2768.15,2710.17 3427.6,2710.17 3750.44,2712.14 1291.78,2729.85 2118.55,2729.85 4776.03,2729.85 4864.61,2729.85 6648.08,2731.82 2059.49,2739.7 6872.49,2743.63 1380.36,2749.54 2659.89,2749.54 2856.74,2749.54 3466.97,2759.38 2443.35,2769.22 1449.26,2779.07 1577.21,2788.91 6494.53,2790.88 5730.75,2798.75 6390.2,2798.75 1301.62,2808.59 4411.86,2808.59 4510.28,2808.59 4677.6,2808.59 1104.77,2828.28 6648.08,2834.18 1547.68,2847.96 2344.93,2847.96 2423.67,2847.96 4087.05,2847.96 4136.26,2847.96 5720.91,2847.96 6529.97,2849.93 3516.19,2867.65 6764.22,2867.65 3260.28,2877.49 6016.19,2877.49 1738.63,2885.37 2945.32,2887.33 3053.59,2887.33 3161.86,2887.33 5681.54,2887.33 5720.91,2887.33 3358.71,2897.18 6173.67,2907.02 5321.3,2920.8 2374.45,2936.55 2699.26,2946.39 6016.19,2946.39 3398.08,2956.23 6085.08,2956.23 6153.98,2956.23 2433.51,2966.07 2827.21,2966.07 6390.2,2966.07 1104.77,2975.92 6764.22,2975.92 2896.11,2985.76 3516.19,2985.76 6872.49,2995.6 2965.01,3005.44 4581.15,3015.29 3460.28,3020.17 4608.71,3038.91 2403.98,3044.81 4707.13,3054.66 6281.93,3054.66 4857.28,3063.17 1321.3,3064.5 2453.19,3064.5 2797.68,3064.5 2866.58,3064.5 6390.2,3064.5 3398.08,3074.34 6764.22,3074.34 4081.15,3082.22 1094.93,3094.03 2935.48,3094.03 3516.19,3094.03 4746.5,3094.03 1528,3113.71 4707.13,3113.71 4785.87,3123.55 4081.15,3129.46 3033.9,3133.4 2955.16,3143.24 5327.21,3153.08 5356.74,3153.08 1459.1,3162.92 2059.49,3162.92 3102.8,3162.92 3201.23,3162.92 3270.12,3162.92 3398.08,3162.92 3516.19,3162.92 4746.5,3162.92 5045.71,3168.83 5077.21,3168.83 5108.71,3168.83 1321.3,3172.77 2138.23,3172.77 6764.22,3172.77 5687.45,3176.7 5770.12,3176.7 5848.86,3176.7 5927.6,3176.7 6872.49,3176.7 1390.2,3182.61 4805.56,3182.61 5346.89,3192.45 2766.19,3196.39 1685.48,3221.98 6764.22,3271.19 3624.45,3298.75 2974.85,3310.56 3083.12,3320.41 3398.08,3320.41 2758.31,3330.25 2866.58,3330.25 3142.17,3330.25 3240.6,3330.25 3506.34,3330.25 4087.05,3340.09 4254.38,3349.93 3624.45,3353.87 4638.23,3359.78 4815.4,3359.78 4854.77,3359.78 2359.28,3364.17 2409.28,3364.17 2313.28,3365.17 2616.28,3366.17 6872.49,3365.68 1970.91,3369.62 2089.02,3369.62 6665.79,3369.62 6764.22,3369.62 2571.3,3379.46 1647.28,3381.17 1749.28,3388.17 2569.28,3423.17 5116.58,3424.74 6764.22,3468.04 3634.3,3477.89 6006.34,3477.89 6114.61,3477.89 1777.28,3486.17 2886.26,3487.73 3516.19,3487.73 4982.72,3487.73 5248.47,3487.73 5327.21,3487.73 5405.95,3487.73 5553.59,3487.73 5642.17,3487.73 5730.75,3487.73 5829.18,3487.73 3043.75,3497.57 6606.74,3497.57 2748.47,3507.41 2974.85,3507.41 3398.08,3507.41 6409.89,3507.41 3644.14,3517.26 4254.38,3517.26 2126.28,3524.17 2837.05,3527.1 3250.44,3527.1 6301.62,3527.1 6498.47,3527.1 1815.28,3531.17 1923.28,3531.17 1415.28,3535.17 4106.74,3536.94 1502.28,3543.17 4293.75,3546.78 1610.28,3553.17 2619.28,3557.17 3132.33,3556.63 2059.49,3566.47 6764.22,3566.47 1868.28,3567.17 2758.31,3576.31 6380.36,3576.31 6636.26,3576.31 6872.49,3578.28 1350.28,3586.17 3516.19,3586.15 6026.03,3586.15 1236.28,3589.17 2935.48,3596 3033.9,3596 3201.23,3605.84 3398.08,3605.84 5130.36,3605.84 5612.64,3605.84 5681.54,3605.84 5740.6,3605.84 4923.67,3613.71 2566.28,3616.17 6065.4,3615.68 2315.4,3625.52 2472.88,3625.52 2797.68,3625.52 3648.08,3625.52 1828.28,3628.17 4254.38,3645.21 1498.28,3647.17 4959.1,3649.15 6026.03,3655.05 6311.46,3655.05 1418.28,3661.17 3270.12,3664.89 6764.22,3664.89 1988.28,3675.17 2148.08,3674.74 3033.9,3674.74 3132.33,3674.74 3398.08,3674.74 3811.46,3674.74 3870.52,3674.74 6439.41,3684.58 6636.26,3684.58 3516.19,3694.42 1321.3,3714.11 2522.09,3714.11 3781.93,3714.11 3840.99,3714.11 5150.04,3714.11 2935.48,3723.95 6089.02,3723.95 3655.95,3727.89 3699.26,3727.89 3063.43,3733.79 6203.19,3733.79 6872.49,3739.7 1528,3743.63 5711.07,3743.63 6291.78,3743.63 6350.83,3743.63 6596.89,3743.63 2846.89,3753.48 3230.75,3753.48 3398.08,3753.48 6518.15,3753.48 2246.28,3756.17 1927.28,3769.17 3132.33,3773.16 1331.15,3783 3516.19,3783 2758.31,3792.85 4972.88,3792.85 5524.06,3792.85 2453.19,3812.53 2935.48,3812.53 5779.97,3812.53 5878.39,3812.53 5951.23,3814.5 2098.86,3822.37 2325.24,3822.37 6065.4,3822.37 3398.08,3851.9 4392.17,3861.74 5317.37,3871.59 5197.28,3877.17 2561.28,3878.17 3526.03,3881.43 4352.8,3881.43 1222.88,3891.27 6872.49,3893.24 1921.28,3899.17 3949.26,3901.11 4008.31,3901.11 4057.52,3901.11 5415.79,3910.96 3565.4,3920.8 5467.6,3920.8 5986.66,3920.8 2259.28,3926.17 2482.72,3940.48 2925.63,3940.48 3398.08,3950.33 3526.03,3950.33 2028.28,3959.17 6134.3,3979.85 6488.63,3979.85 1340.99,3999.54 2167.76,3999.54 5711.07,4019.22 6951.23,4019.22 5848.86,4029.07 6340.99,4029.07 2335.08,4038.91 1917.28,4048.17 6488.63,4048.75 2430.28,4050.17 6016.19,4058.59 2541.78,4068.44 3417.76,4068.44 6134.3,4068.44 6911.86,4068.44 4707.13,4107.81 2089.02,4137.33 4785.87,4137.33 2978.78,4141.27 3061.46,4141.27 3644.14,4147.18 1669.28,4164.17 2463.04,4166.86 6803.59,4166.86 1917.28,4174.17 4648.08,4176.7 2246.5,4186.55 4992.56,4196.39 5067.45,4196.39 6055.56,4196.39 5648.08,4200.33 4756.34,4206.23 5031.93,4206.23 6774.06,4206.23 5868.55,4216.07 6331.15,4216.07 3309.49,4225.92 6193.35,4225.92 6823.27,4235.76 6882.33,4235.76 2038.28,4241.17 1124.45,4245.6 2551.62,4245.6 6528,4245.6 1242.56,4255.44 2364.61,4255.44 5898.08,4255.44 6754.38,4255.44 2157.92,4275.13 1916.28,4276.17 4648.08,4284.97 6281.93,4284.97 3230.75,4294.81 4864.61,4304.66 4923.67,4304.66 6498.47,4304.66 2108.28,4314.17 3063.43,4314.5 6557.52,4324.34 2620.52,4334.18 1669.28,4338.17 4864.61,4353.87 4923.67,4353.87 6508.31,4393.24 1606.28,4395.17 5061.46,4403.08 4648.08,4422.77 6567.37,4422.77 1751.28,4425.17 4746.5,4442.45 5494.53,4452.3 2618.28,4457.17 5553.59,4462.14 1750.28,4463.17 2528.28,4463.17 2365.28,4464.17 1383.28,4467.17 6508.31,4471.98 2614.28,4522.17 1401.28,4531.17 4982.72,4531.04 2185.28,4537.17 1803.28,4549.17 4648.08,4550.72

## Polygon pours and split planes (outlines as drawn)
no net on Bottom Layer "Top Layer-No Net" (solid, remove dead copper, pour order 1000): 1065.4,1538.91 1104.77,1499.54 6931.54,1499.54 6970.91,1538.91 6970.91,1735.76 6970.91,4531.04 6931.54,4570.41 1104.77,4570.41 1065.4,4531.04
no net on Top Layer "Top Layer-No Net" (solid, pour order 1001): 1065.4,1538.91 1104.77,1499.54 6931.54,1499.54 6970.91,1538.91 6970.91,1853.87 6970.91,4531.04 6931.54,4570.41 1104.77,4570.41 1065.4,4531.04

## Other copper
Top Layer:
  region: 2345.28,2981.17 2345.28,3023.84 2273.78,3023.84 2273.78,2981.17
  region: 1975.83,2910.17 1975.83,3166.86 1763.23,3166.86 1763.23,2910.17
  region: 2273.78,2909.67 2273.78,3023.84 1896.59,3023.84 1896.59,2909.67
  region: 2015.2,2997.57 1975.83,3036.94 1952.21,3013.32 1991.58,2973.95
  region: 5104.28,3633.17 5104.28,3696.17 5054.28,3696.17 5054.28,3633.17

## Silkscreen, mask and mechanical layers (free items; w line width, h text height)
Top Overlay:
  region: 2412.28,3179.17 2412.28,3220.17 2251.28,3220.17 2251.28,3179.17
  region: 5372.28,4439.17 5372.28,4480.17 5211.28,4480.17 5211.28,4439.17
  lines w3.94: 5419.28,4461.17 5552.62,4461.17 ; 5518.28,4461.17 5572.28,4407.17 ; 5540.28,4377.17 5762.28,4377.17 ; 5540.28,4407.17 5572.28,4407.17 ; 5572.28,4440.17 5572.28,4407.17 ; 5640.2,2393.24 5943.35,2393.24 ; 5931.54,2353.87 5931.54,2377.49 ; 5955.16,2377.49 5931.54,2377.49 ; 6029.97,1976.9 5959.1,1976.9 5959.1,2000.22 5959.1,2046.84 5959.1,2070.16 5959.1,2349.93 5931.54,2377.49 ; 2718.94,4365.68 2738.63,4346 3278,4346 3297.68,4365.68 3297.68,4503.48 3278,4523.16 2738.63,4523.16 2718.94,4503.48 2718.94,4365.68
  lines w39.37: 4478.78,2609.78 4774.06,2609.78 ; 4478.78,2727.89 4774.06,2727.89 ; 6010.28,3865.68 6010.28,4160.96 ; 6037.84,2645.21 6037.84,2940.48 ; 6120.52,3869.62 6120.52,4164.89 ; 6148.08,2645.21 6148.08,2940.48
  text "R02,R04:USART3" at 3278,4491.67 h47.24 r180
  text "R01,R03:USART1" at 3278,4412.92 h47.24 r180
  text "POWER" at 1253.28,3287.17 h39.37 r90
  text "Storage Cabinet V1.0" at 5081.88,3282.22 h78.74
  text "20141028" at 2900.04,2621.59 h78.74
  text "e_lin" at 2970.91,2491.67 h78.74
  text "1" at 6659.89,2011.35 h39.37 r90
  text "GND" at 3260.28,1986.74 h39.37
  text "CANL" at 3446.3,1986.74 h39.37
  text "CANH" at 3636.26,1986.74 h39.37
  text "12V" at 3859.69,1986.74 h39.37
  text "SPK" at 4115.6,1575.33 h39.37
  text "12VDC_IN" at 2111.66,1517.26 h78.74
Mechanical 1:
  lines w10: 1027.01,1458.2 1027.01,4607.81 7011.26,4607.81 7011.26,1458.2 1027.01,1458.2

## Text inside footprints (layer, text, board x,y; h text height)
U01: Top Overlay "1" at 6284.31,2473.11 h39.37; Top Overlay "3" at 6464.31,2473.11 h39.37
U13: Top Overlay "1" at 1823.89,3142.91 h39.37 r270; Top Overlay "3" at 1823.89,2962.91 h39.37 r270